# Altium PCB 03-LcdSegment.PcbDoc
Units mm, origin at the board's own origin, x right, y up, seen from the top; angles counter-clockwise.
Board outline 40.26 x 39.88 mm, 4 copper layers (Top Layer, Internal Plane 1, Internal Plane 2, Bottom Layer), stack 0.462 mm thick; 14 components, 29 nets, 96 pads, 0 vias.
Unrouted connection lines stored in the file: 44.
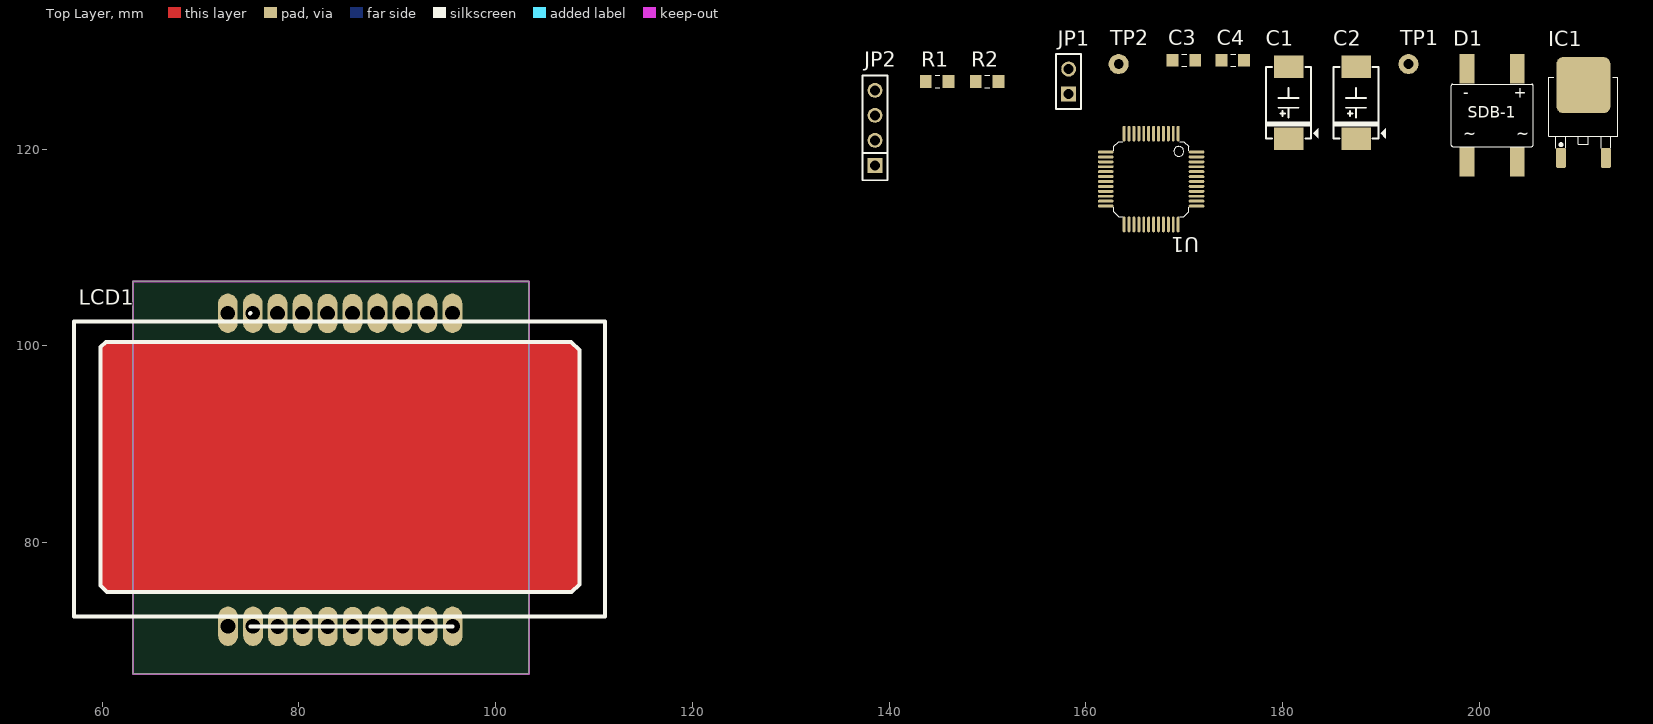
[diagram p0: Top Layer view]
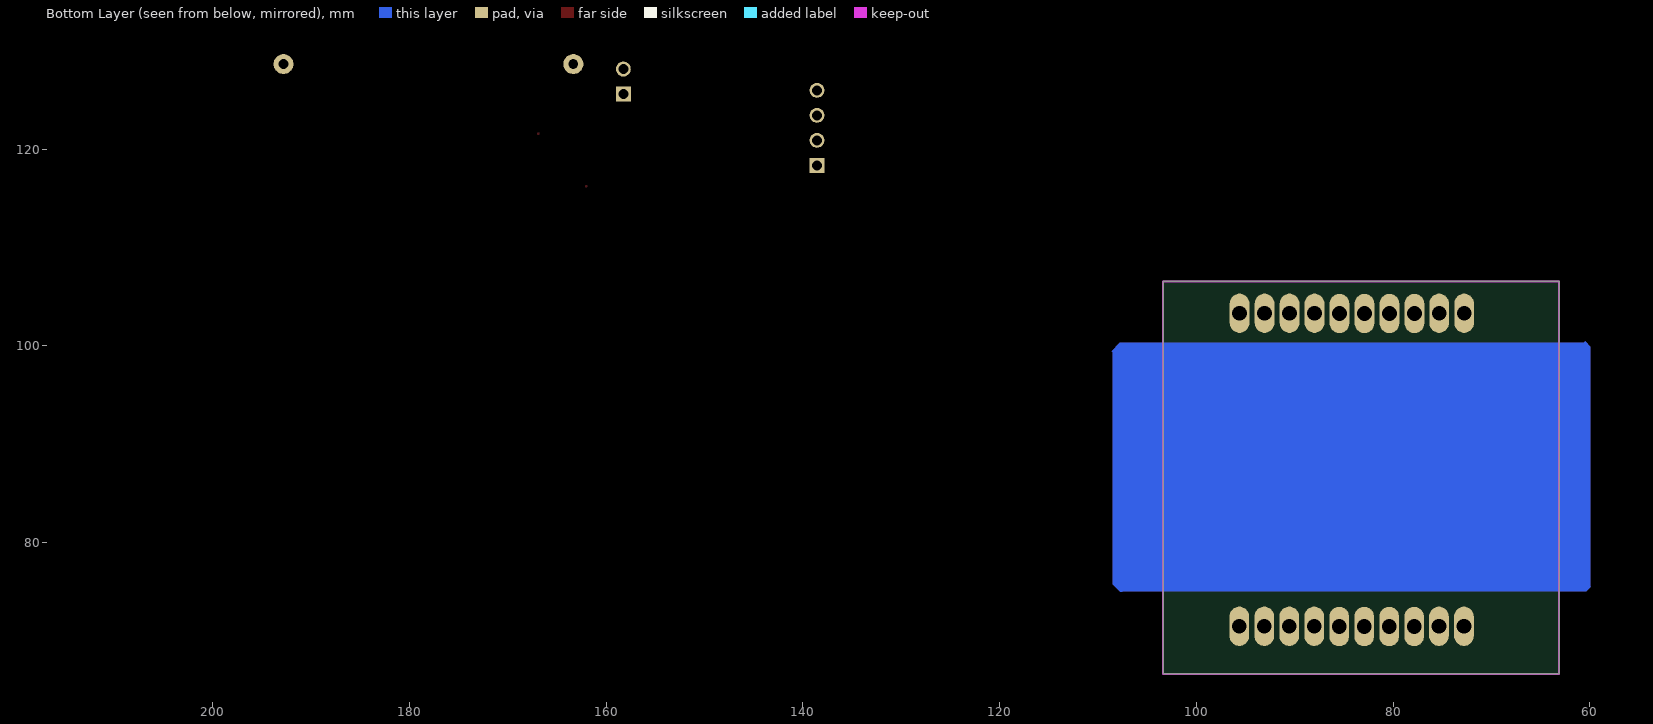
[diagram p1: Bottom Layer view, seen from below]
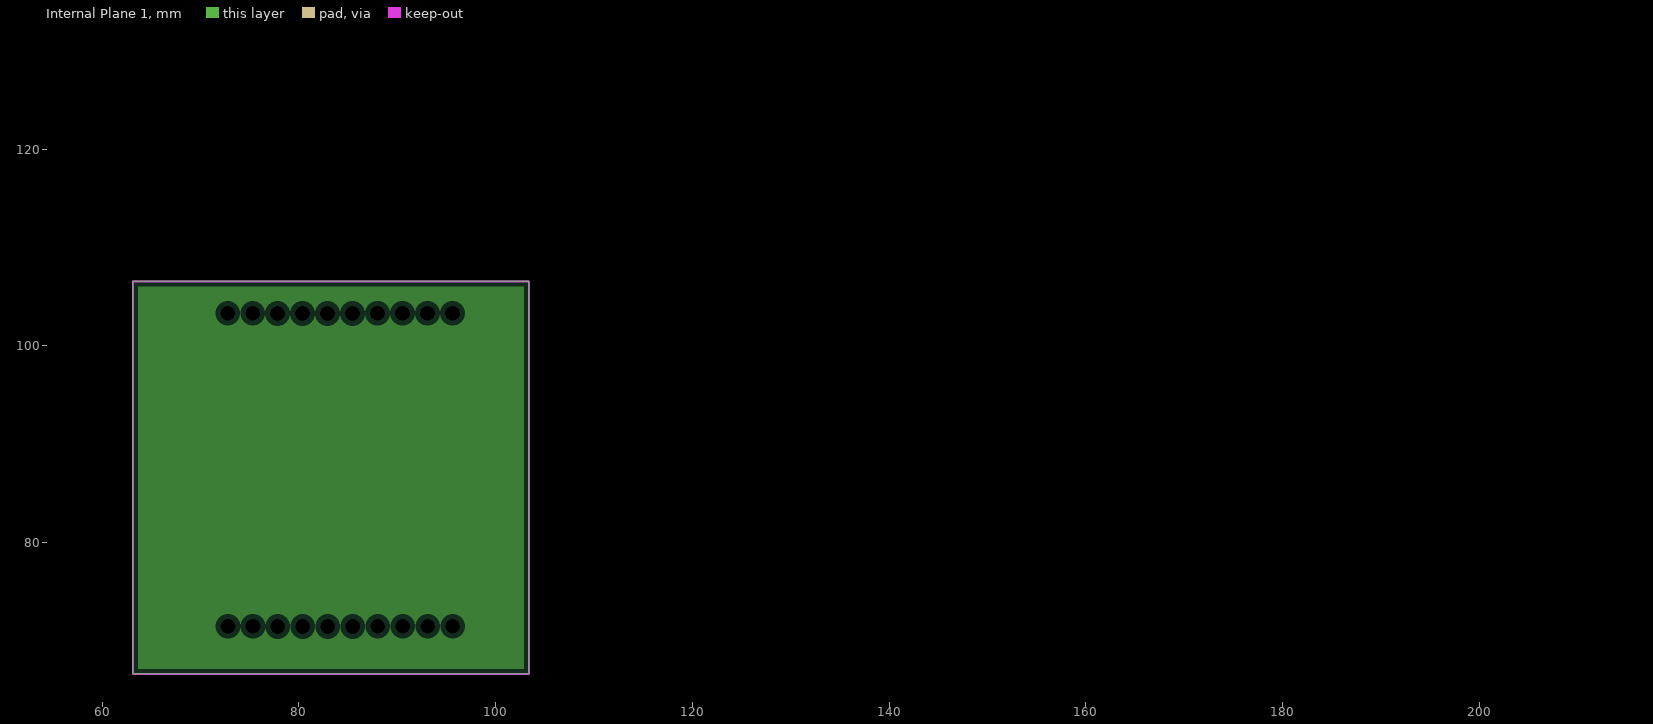
[diagram p2: Internal Plane 1, clearances drawn from the general rule]
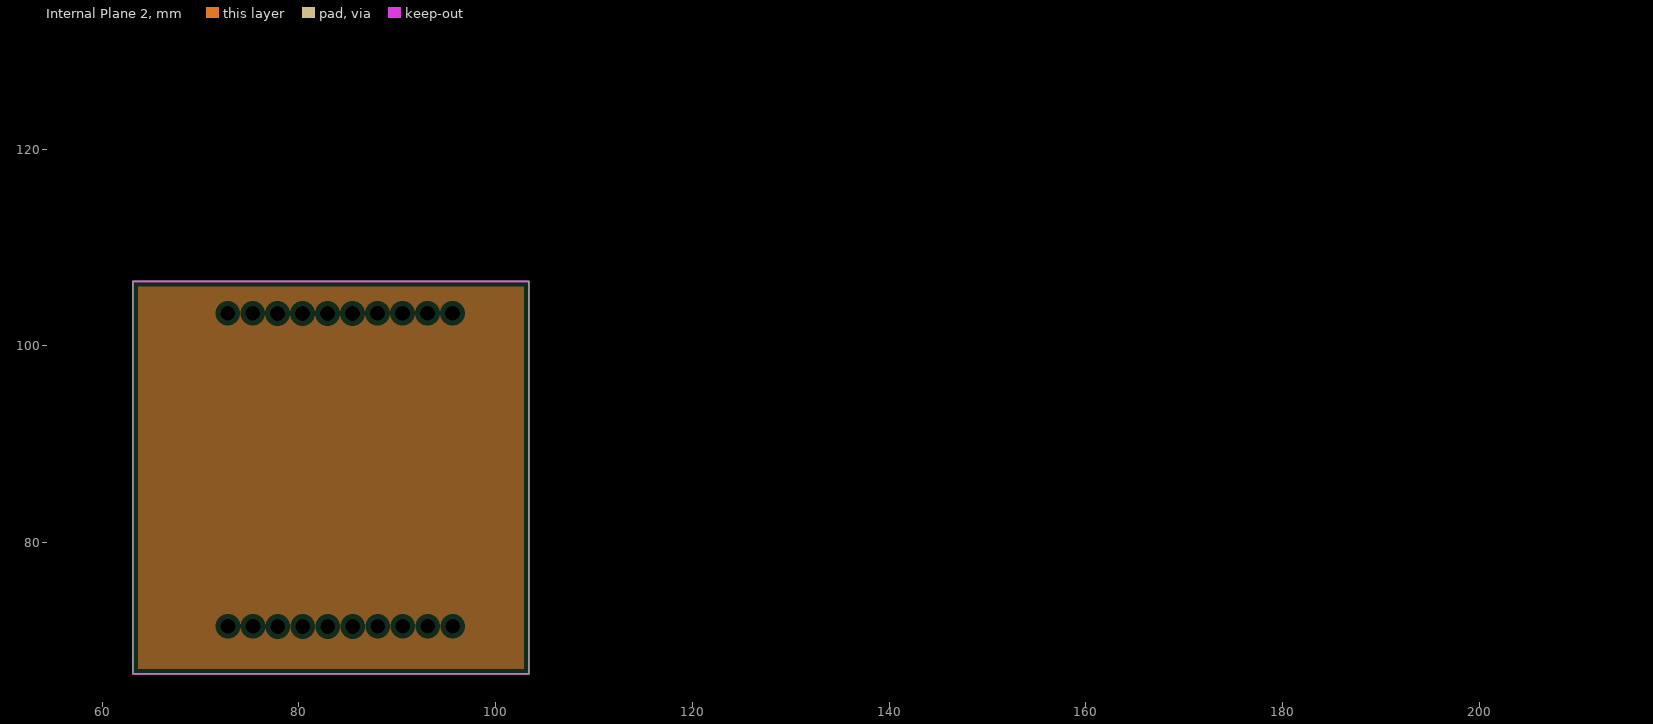
[diagram p3: Internal Plane 2, clearances drawn from the general rule]

## Layer stack, top to bottom
Top Solder: solder mask 0.0102, Solder Resist, Dk 3.5
Top Layer: signal copper 0.0356
Internal Plane 1: plane copper 0.0356
Internal Plane 2: plane copper 0.0356
Dielectric 1: dielectric 0.32, FR-4, Dk 4.8
Bottom Layer: signal copper 0.0356
Bottom Solder: solder mask 0.0102, Solder Resist, Dk 3.5

## Board outline
63.119,66.675 63.119,106.553 103.378,106.553 103.378,66.675

## Design rules (kind name [scope] priority, off if disabled: settings)
Clearance [All] p1: gap=0.2
PlaneClearance [All] p1: clearance=0.508
PlaneConnect [All] p1: planeconnectstyle=Relief reliefexpansion=0.508 reliefentries=4 reliefconductorwidth=0.254 reliefairgap=0.254
PolygonConnect [All] p1: connectstyle=Relief reliefconductorwidth=0.254 reliefentries=4 polygonreliefangle="90 Angle" airgapwidth=0.254
RoutingVias [All] p1: holewidth=0.6 width=1 viastyle="Through Hole" minholewidth=0.711 minwidth=1.27 maxholewidth=0.711 maxwidth=1.27
SolderMaskExpansion [All] p1: expansion=0.102
Width [All] p1: maxlimit=0.2 minlimit=0.2 preferedwidth=0.2
28 further rules are at their usual default settings.

## Components (designator, comment, footprint, x,y, rotation, side; value= is the part's Value field where it differs from the comment)
C1 "470uF/16V" C-TANT-7343 180.594,124.714 r90 top
C2 "470uF/16V" C-TANT-7343 187.452,124.714 r90 top
C3 "100nF" CER-0805 169.926,129.032 r0 top
C4 "100nF" CER-0805 174.879,129.032 r0 top
D1 "DB 1A" D-DB-1A-SMD 201.295,123.444 r0 top
IC1 "LM78xx" TO252-123 210.566,122.809 r0 top
JP1 "JP2" JP2-C1T 158.242,125.603 r90 top
JP2 "JP4" JP4-C1T 138.557,118.364 r90 top
LCD1 "LCD" LCD_SEG_6 113.03,70.612 r180 top
R1 "10K" RES-0805 144.907,126.873 r0 top
R2 "10K" RES-0805 149.987,126.873 r0 top
TP1 "1" TP 192.786,128.651 r0 top
TP2 "1" TP 163.322,128.651 r0 top
U1 "H1621B" LQFP-48 166.624,116.967 r180 top

## Footprints (in the part's own frame and the unit in brackets; to place one, negate y for a bottom-side part, rotate by r counter-clockwise, add the part's x,y. Pads: shape width x height; smd on the part's side, far side on the other; paste and mask are expansions set on the pad)
C-TANT-7343 [mm] "Tantalium Capacitor 7343-31"
  rect 2.3x3 smd: 1(-3.65,0) 2(3.65,0)
  silkscreen extent -3.65,-3 3.65,2.3, body extent -3.79,-2.3 3.81,2.3, height 3.1
CER-0805 [mm]
  rect 1.2x1.3 smd: 1(-1.116,0) 2(1.192,0)
  silkscreen extent -0.17,-0.63 0.33,0.63, body extent -0.97,-0.65 1.03,0.6, height 0.8
D-DB-1A-SMD [mm] "DB106S"
  rect 1.5x3 smd: 1(-2.55,-4.713) 2(2.55,-4.713) 3(2.55,4.713) 4(-2.55,4.713)
  silkscreen extent -4.15,-3.18 4.15,3.18, body extent -4.15,-4.95 4.15,4.95, height 3.35
JP2-C1T [mm] "2 row, straight, gold plating"
  rect 1.52x1.52 hole 1.02: 1(0,0)
  round 1.52 hole 1.02: 2(2.54,0)
  silkscreen extent -1.52,-1.27 4.06,1.27, body extent -1.52,-1.25 4.06,1.25, height 8.51
JP4-C1T [mm] "4 row, straight, gold plating"
  rect 1.52x1.52 hole 1.02: 1(0,0)
  round 1.52 hole 1.02: 2(2.54,0) 3(5.08,0) 4(7.62,0)
  silkscreen extent -1.52,-1.27 9.14,1.27, body extent -1.52,-1.25 9.14,1.25, height 8.51
LCD_SEG_6 [mm]
  oval 2x4 hole 1.5: 1(17.399,-0.889) 2(19.939,-0.889) 3(22.479,-0.889) 4(25.019,-0.889) 5(27.559,-0.864) 6(30.099,-0.864) 7(32.639,-0.864) 8(35.179,-0.864) 9(37.694,-0.889) 10(40.234,-0.889) 11(17.424,-32.715) 12(19.964,-32.715) 13(22.504,-32.715) 14(25.044,-32.715) 15(27.584,-32.69) 16(30.124,-32.69) 17(32.664,-32.69) 18(35.204,-32.69) 19(37.719,-32.715) 20(40.259,-32.715)
  Multi-Layer region: 5.512,-4.42 5.537,-4.445 52.68,-4.445 53.137,-4.902 53.086,-4.953 53.086,-29.312 52.553,-29.845 52.4,-29.693 5.258,-29.693 4.42,-28.854 4.521,-28.753 4.521,-5.182 5.283,-4.42 5.436,-4.42
  silkscreen extent 1.91,-32.72 55.88,-0.86
LQFP-48 [mm]
  oval 0.3x1.6 smd: 1(-2.75,-4.616) 2(-2.25,-4.616) 3(-1.75,-4.616) 4(-1.25,-4.616) 5(-0.75,-4.616) 6(-0.25,-4.616) 7(0.25,-4.616) 8(0.75,-4.616) 9(1.25,-4.616) 10(1.75,-4.616) 11(2.25,-4.616) 12(2.75,-4.616) 25(2.75,4.616) 26(2.25,4.616) 27(1.75,4.616) 28(1.25,4.616) 29(0.75,4.616) 30(0.25,4.616) 31(-0.25,4.616) 32(-0.75,4.616) 33(-1.25,4.616) 34(-1.75,4.616) 35(-2.25,4.616) 36(-2.75,4.616)
  oval 1.6x0.3 smd: 13(4.616,-2.75) 14(4.616,-2.25) 15(4.616,-1.75) 16(4.616,-1.25) 17(4.616,-0.75) 18(4.616,-0.25) 19(4.616,0.25) 20(4.616,0.75) 21(4.616,1.25) 22(4.616,1.75) 23(4.616,2.25) 24(4.616,2.75) 37(-4.616,2.75) 38(-4.616,2.25) 39(-4.616,1.75) 40(-4.616,1.25) 41(-4.616,0.75) 42(-4.616,0.25) 43(-4.616,-0.25) 44(-4.616,-0.75) 45(-4.616,-1.25) 46(-4.616,-1.75) 47(-4.616,-2.25) 48(-4.616,-2.75)
  Top Layer lines w0.254: 4.616,0.75 4.616,0.75 ; -0.25,-4.616 -0.25,-4.616
  silkscreen extent -3.81,-3.81 3.81,3.81, body extent -4.62,-4.62 4.62,4.62, height 1.53
RES-0805 [mm]
  rect 1.2x1.3 smd: 1(-1.192,0) 2(1.116,0)
  silkscreen extent -0.25,-0.63 0.25,0.63, body extent -1.05,-0.62 0.95,0.63, height 0.5
TO252-123 [mm]
  round 0.5 on Mech15: 0(0,0)
  rrect25% 1x2 smd: 1(-2.285,-3.7) 3(2.285,-3.7)
  rrect25% 5.5x5.7 smd: 2(0,3.7)
  silkscreen extent -3.5,-2.7 3.5,4.5, body extent -3.3,-3.95 3.3,5.76, height 2.31
TP [mil] "Connect 1"
  round 80 hole 39: TP1(0,0)

## Part data
C1 C2: library part Capacitor
C3 C4: library part Ceramic
D1: library part DB
IC1: "Positive Voltage Regulator"
JP1 JP2: "WR-PHD 2.54 mm Angled Socket Header"
LCD1: library part LCD_SEG
R1 R2: library part Res1/4W
TP1 TP2: library part TP, "CONNECT 1"

## Nets (pads, with @x,y where several pads share a name; then routed paths per layer and width w, separated by ;. In a path a pad name is that pad's centre, name@x,y a point inside that pad or via, vN(x,y) a via of type N, cw(c..) or ccw(c..) an arc to the next point about the centre after c; other vN are vias at no path point)
+5V: C2.1 C4.2 IC1.3 JP1.1 R1.2 R2.2 U1.9
+12V: C1.1 C3.2 D1.4 IC1.1
AC1: D1.1 TP1.TP1
AC2: D1.2 TP2.TP1
COM1: LCD1.1 U1.13
COM2: LCD1.2 U1.14
COM3: LCD1.3 U1.15
COM4: LCD1.4 U1.16
CS: JP2.1 R2.1 U1.1
DATA: JP2.4 U1.4
GND: C1.2 C2.2 C3.1 C4.1 D1.3 IC1.2 JP1.2 U1.5
RD: JP2.2 R1.1 U1.2
SEG0: LCD1.5 U1.48
SEG1: LCD1.6 U1.47
SEG2: LCD1.7 U1.46
SEG3: LCD1.8 U1.45
SEG4: LCD1.9 U1.44
SEG5: LCD1.10 U1.43
SEG6: LCD1.11 U1.42
SEG7: LCD1.12 U1.41
SEG8: LCD1.13 U1.40
SEG9: LCD1.14 U1.39
SEG10: LCD1.15 U1.38
SEG11: LCD1.16 U1.37
SEG12: LCD1.17 U1.36
SEG13: LCD1.18 U1.35
SEG14: LCD1.19 U1.34
SEG15: LCD1.20 U1.33
WR: JP2.3 U1.3
pads on no net: IC1.0 U1.6 U1.7 U1.8 U1.10 U1.11 U1.12 U1.17 U1.18 U1.19 U1.20 U1.21 U1.22 U1.23 U1.24 U1.25 U1.26 U1.27 U1.28 U1.29 U1.30 U1.31 U1.32

## Keep-outs
Keep-Out Layer:
  the board outline again, w0.2

## Text inside footprints (layer, text, board x,y; h text height)
D1: Top Overlay "SDB-1" at 198.787,122.804 h2; Top Overlay "-         +" at 198.374,124.841 h2; Top Overlay "~        ~" at 198.374,120.65 h2